# Altium PCB Midi_to_CV.PcbDoc
Units mil, origin at the board's own origin, x right, y up, seen from the top; angles counter-clockwise.
Board outline 2600 x 2200 mil, 2 copper layers (Top Layer, Bottom Layer); 25 components, 29 nets, 143 pads, 0 vias.
Unrouted connection lines stored in the file: 63.
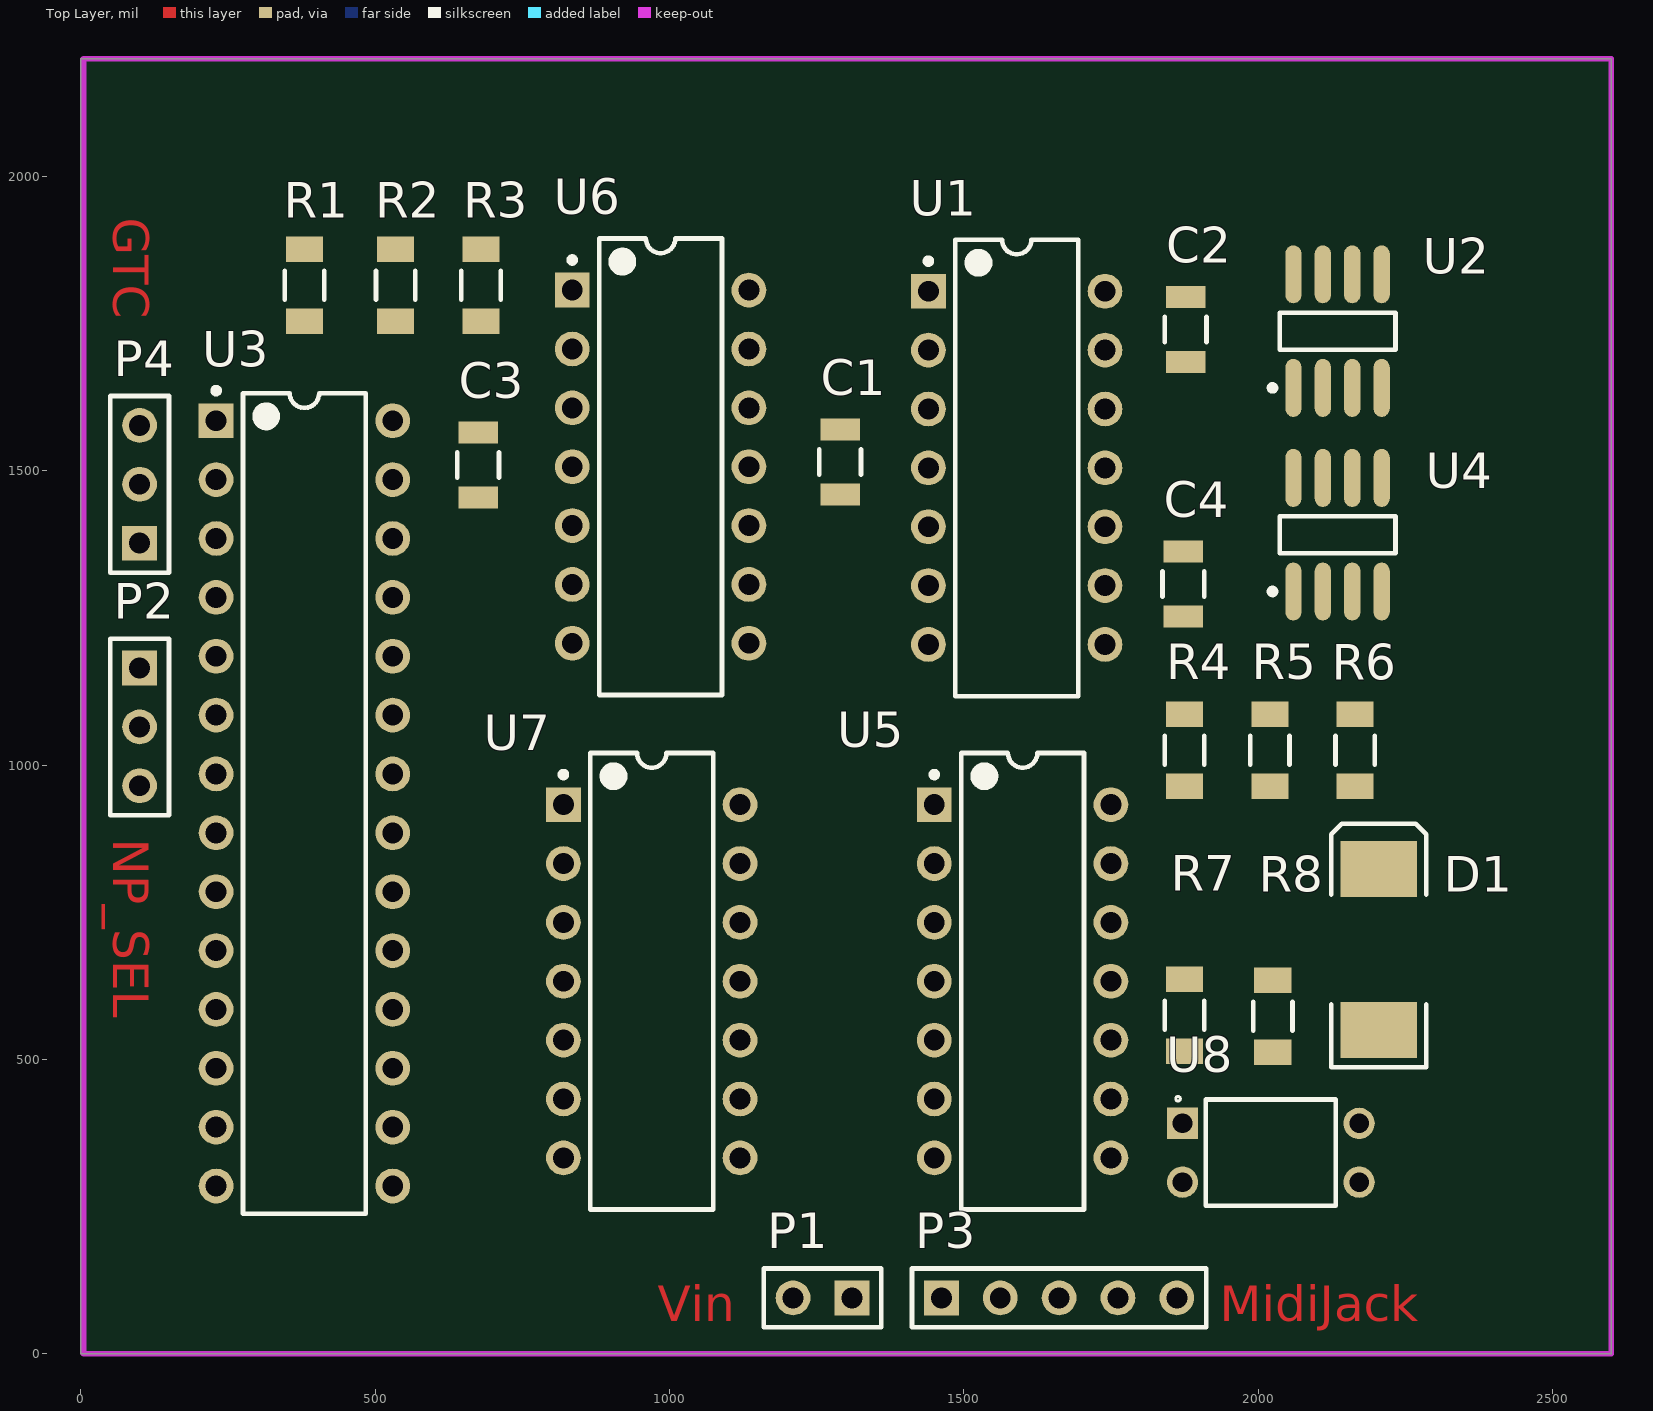
[diagram p0: Top Layer view]
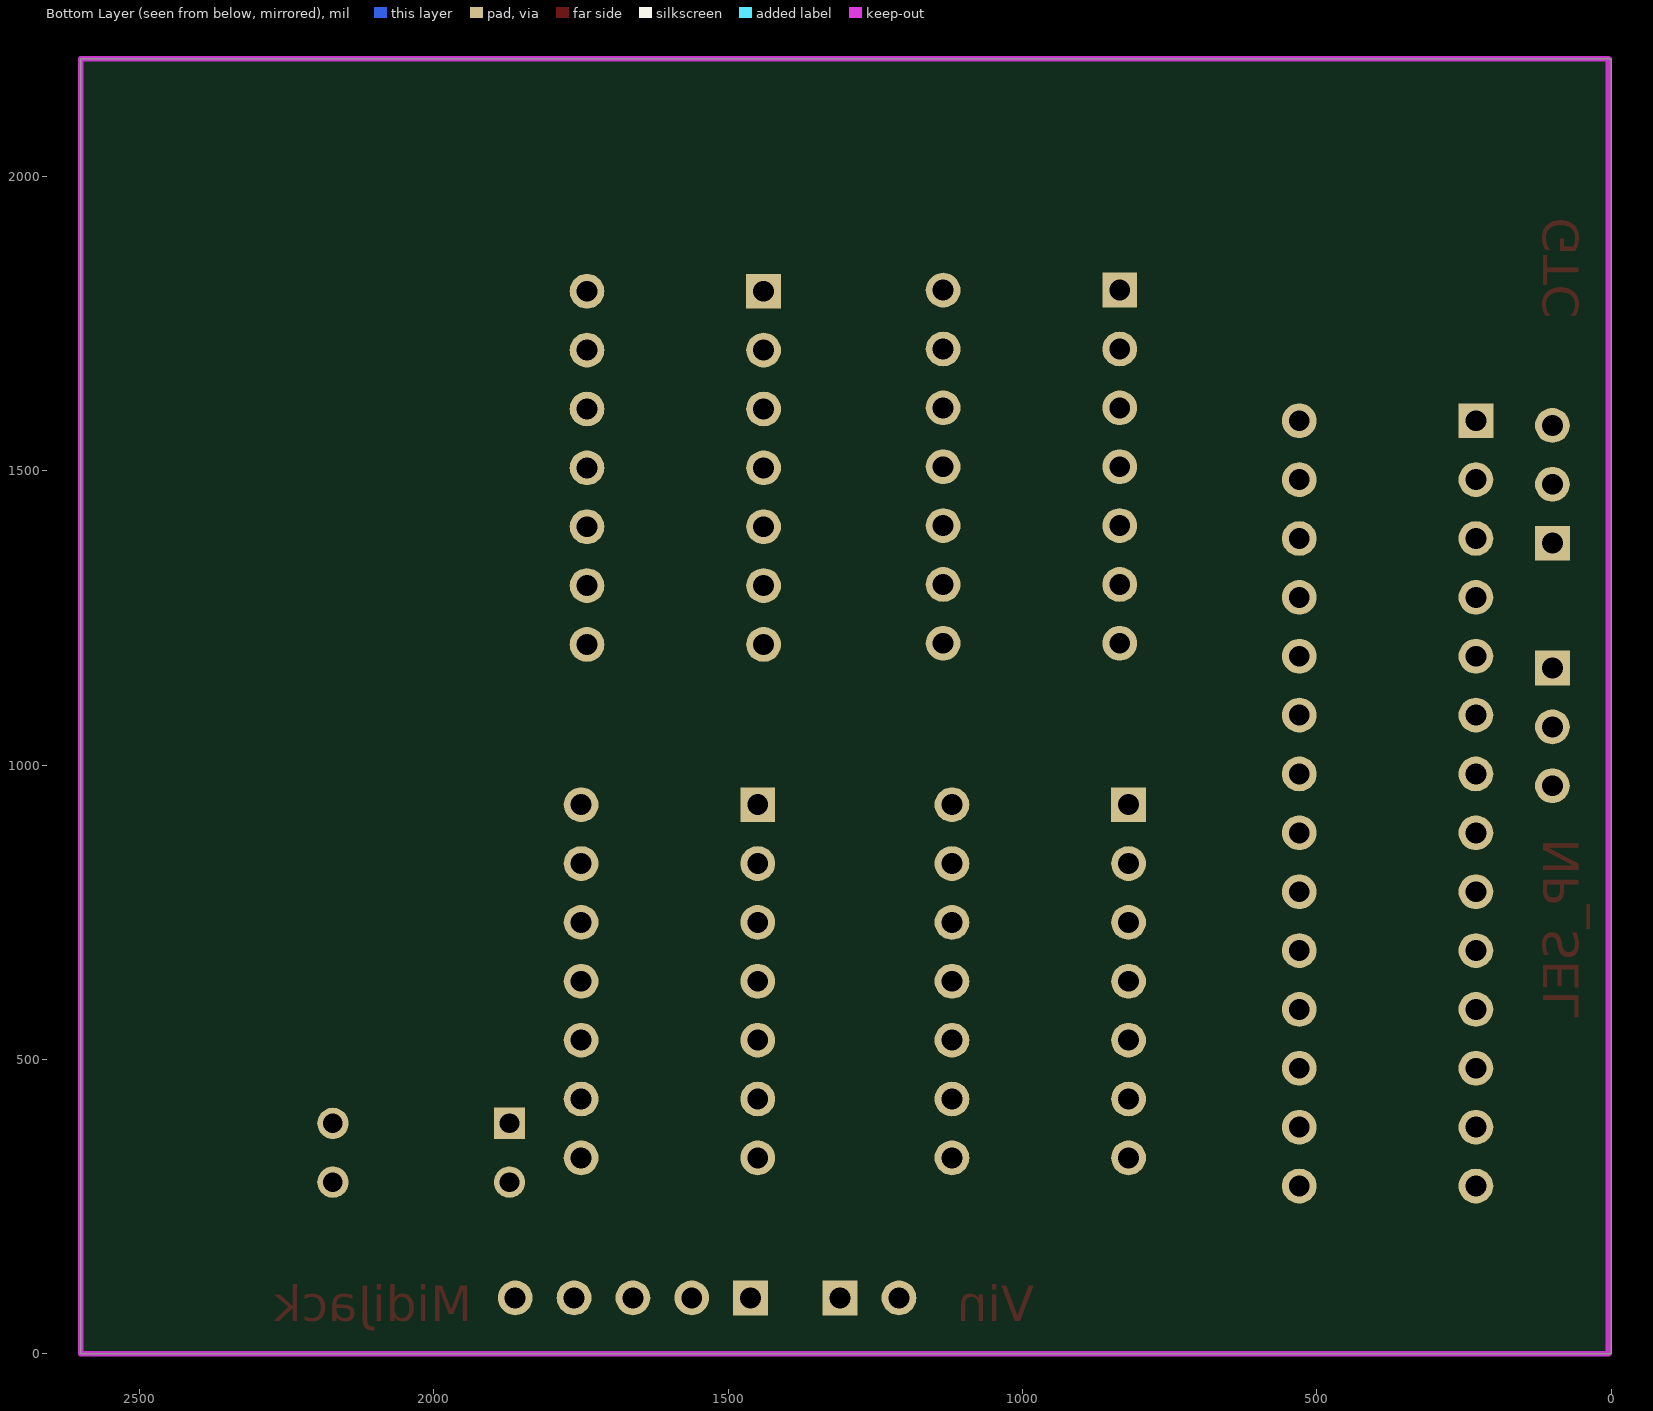
[diagram p1: Bottom Layer view, seen from below]

## Layer stack, top to bottom
Top Solder: solder mask 0.4, Solder Resist, Dk 3.5
Top Layer: signal copper 1.4
Dielectric 1: dielectric 12.6, FR-4, Dk 4.8
Bottom Layer: signal copper 1.4
Bottom Solder: solder mask 0.4, Solder Resist, Dk 3.5

## Board outline
0,0 0,2200 2600,2200 2600,0

## Design rules (kind name [scope] priority, off if disabled: settings)
Clearance [All] p1: gap=10 ignorepadtopadclearanceinfootprint=FALSE except(0: Arc-Hole Track-Hole SMDPad-Hole THPad-Hole Via-Hole Fill-Hole Poly-Hole Region-Hole Text-Hole)
PolygonConnect [All] p1: connectstyle=Relief reliefconductorwidth=10 reliefentries=4 polygonreliefangle="90 Angle" airgapwidth=10
RoutingVias [All] p1: holewidth=28 width=50 viastyle="Through Hole" minholewidth=28 minwidth=50 maxholewidth=28 maxwidth=50
SolderMaskExpansion [All] p1: expansion=4 istentingtop=FALSE
Width [All] p1: maxlimit=20 minlimit=10 preferedwidth=20 minimp=50.000000 maximp=50.000000 favimp=50.000000
30 further rules are at their usual default settings.

## Classes and differential pairs
component class Midi_to_CV: C1 C2 C3 C4 D1 P1 P2 P3 P4 R1 R2 R3 R4 R5 R6 R7 R8 U1 U3 U5 U6 U7 U8

## Components (designator, comment, footprint, x,y, rotation, side; value= is the part's Value field where it differs from the comment)
C1 "C1206C103JARACTU" FP-C1206C-EB-MFG 1290.12,1515 r270 top value="10,000 pF"
C2 "C1206C103JARACTU" FP-C1206C-EB-MFG 1876.97,1740.12 r90 top value="10,000 pF"
C3 "C1206C103JARACTU" FP-C1206C-EB-MFG 675,1510 r270 top value="10,000 pF"
C4 "C1206C103JARACTU" FP-C1206C-EB-MFG 1873.03,1307.8 r90 top value="10,000 pF"
D1 "Diode" SMC 2205,686.81 r90 top
P1 "J3" HDR1X2 1310,95 r180 top
P2 "NP_SEL" HDR1X3 100,1165 r270 top
P3 "MIDIJACK" HDR1X5 1462.01,95 r0 top
P4 "GTC_OUTL" HDR1X3 100,1377.09 r90 top
R1 "RNCP1206FTD4K02" FP-RNCP1206-MFG 380,1815 r90 top
R2 "RNCP1206FTD4K02" FP-RNCP1206-MFG 535,1815 r90 top
R3 "RNCP1206FTD4K02" FP-RNCP1206-MFG 680,1815 r90 top
R4 "RNCP1206FTD4K02" FP-RNCP1206-MFG 1875,1025 r270 top
R5 "RNCP1206FTD4K02" FP-RNCP1206-MFG 2020,1025 r90 top
R6 "RNCP1206FTD4K02" FP-RNCP1206-MFG 2165,1025 r90 top
R7 "RNCP1206FTD4K02" FP-RNCP1206-MFG 1875,575 r90 top
R8 "RNCP1206FTD4K02" FP-RNCP1206-MFG 2025,573.62 r90 top
U1 "LM324N" N0014A 1590,1505 r0 top
U2 "MCP4822-E/SN" SOIC-SN8_M 2135,1737.28 r90 top
U3 "ATmega328P-PU" 28P3 380,935 r0 top
U4 "MCP4822-E/SN" SOIC-SN8_M 2135,1391.46 r90 top
U5 "LM324N" N0014A 1600,632.83 r0 top
U6 "LM324N" N0014A 985,1506.93 r0 top
U7 "LM324N" N0014A 970,632.83 r0 top
U8 "SFH618A-2" DIP762W50P254L458H480Q4 2021.65,341.5 r0 top

## Footprints (in the part's own frame and the unit in brackets; to place one, negate y for a bottom-side part, rotate by r counter-clockwise, add the part's x,y. Pads: shape width x height; smd on the part's side, far side on the other; paste and mask are expansions set on the pad)
28P3 [mm] "28-Pin Plastic Dual In-Line Package (PDIP)"
  rect 1.5x1.5 hole 0.9: 1(-3.81,16.51)
  round 1.5 hole 0.9: 2(-3.81,13.97) 3(-3.81,11.43) 4(-3.81,8.89) 5(-3.81,6.35) 6(-3.81,3.81) 7(-3.81,1.27) 8(-3.81,-1.27) 9(-3.81,-3.81) 10(-3.81,-6.35) 11(-3.81,-8.89) 12(-3.81,-11.43) 13(-3.81,-13.97) 14(-3.81,-16.51) 15(3.81,-16.51) 16(3.81,-13.97) 17(3.81,-11.43) 18(3.81,-8.89) 19(3.81,-6.35) 20(3.81,-3.81) 21(3.81,-1.27) 22(3.81,1.27) 23(3.81,3.81) 24(3.81,6.35) 25(3.81,8.89) 26(3.81,11.43) 27(3.81,13.97) 28(3.81,16.51)
  silkscreen extent -3.93,-17.7 2.65,17.93, body extent -3.6,-17.65 3.6,17.65, height 4.58
DIP762W50P254L458H480Q4 [mm]
  rect 1.35x1.35 hole 0.85: 1(-3.81,1.27)
  round 1.35 hole 0.85: 2(-3.81,-1.27) 3(3.81,-1.27) 4(3.81,1.27)
  silkscreen extent -4.1,-2.29 2.8,2.43
FP-C1206C-EB-MFG [mm]
  rect 0.95x1.7 smd paste+0 mask+0: 1(-1.4,0) 2(1.4,0)
  silkscreen extent -0.55,-0.9 0.55,0.9, body extent -2,-1 2,1, height 0.25
FP-RNCP1206-MFG [mm]
  rect 1.1x1.6 smd paste+0 mask+0: 1(-1.55,0) 2(1.55,0)
  silkscreen extent -0.62,-0.85 0.62,0.85, body extent -2.2,-0.95 2.2,0.95, height 0.25
HDR1X2 [mm] "Connector; Header; 2 Position"
  rect 1.5x1.5 hole 0.9: 1(0,0)
  round 1.5 hole 0.9: 2(2.54,0)
  silkscreen extent -1.27,-1.27 3.81,1.27
HDR1X3 [mm] "Connector; Header; 3 Position"
  rect 1.5x1.5 hole 0.9: 1(0,0)
  round 1.5 hole 0.9: 2(2.54,0) 3(5.08,0)
  silkscreen extent -1.27,-1.27 6.35,1.27
HDR1X5 [mm] "Connector; Header; 5 Position"
  rect 1.5x1.5 hole 0.9: 1(0,0)
  round 1.5 hole 0.9: 2(2.54,0) 3(5.08,0) 4(7.62,0) 5(10.16,0)
  silkscreen extent -1.27,-1.27 11.43,1.27
N0014A [mm] "DIP, 14-Leads, Body 19.7x6.6mm, Pitch 2.54mm"
  rect 1.5x1.5 hole 0.9: 1(-3.81,7.62)
  round 1.5 hole 0.9: 2(-3.81,5.08) 3(-3.81,2.54) 4(-3.81,0) 5(-3.81,-2.54) 6(-3.81,-5.08) 7(-3.81,-7.62) 8(3.81,-7.62) 9(3.81,-5.08) 10(3.81,-2.54) 11(3.81,0) 12(3.81,2.54) 13(3.81,5.08) 14(3.81,7.62)
  silkscreen extent -3.93,-9.85 2.65,9.85, body extent -3.95,-9.85 3.95,9.85, height 5.08
SMC [mm] "DO-214-AB/SMC; 2 C-Bend Leads; Body 7.9 x 5.9 mm, inc. leads (LxW)"
  rect 2.4x3.3 smd: 1(-3.475,0) 2(3.475,0)
  silkscreen extent -5.07,-2.05 5.43,2.06
SOIC-SN8_M [mm] "SOIC, 8-Leads, Body 4.9x3.9mm, Pitch 1.27mm, IPC Low Density"
  oval 2.5x0.7 smd: 1(-2.45,1.905) 2(-2.45,0.635) 3(-2.45,-0.635) 4(-2.45,-1.905) 5(2.45,-1.905) 6(2.45,-0.635) 7(2.45,0.635) 8(2.45,1.905)
  silkscreen extent -2.57,-2.5 0.8,2.93, body extent -2,-2.5 2,2.5, height 1.75

## Part data
C1 C2 C3 C4: library part CMP-1037-03532-3, "CAP CER 10000PF 250V 5% X7R 1206", Capacitance="0.1 uF", Manufacturer=KEMET, Package=C1206C-EB, Temperature="-55°C to +150°C", Temperature Characteristic=X7R, Temperature Coefficient=15%, Temperature Range High=+150°C, Temperature Range Low=-55°C, Tolerance=0.05, Voltage Rating="250 V", Automotive=Yes, Automotive Grade="Grade 0", Category=Cap, ComponentLink2Description=Datasheet, ComponentLink2URL=https://content.kemet.com/datasheets/KEM_C1007_X8R_ULTRA_150C_SMD.pdf, Device Class L1="Passive Components", Device Class L2=Capacitors, Device Class L3="Ceramic Capacitors", Digikey Description="CAP CER 10000PF 250V 5% X7R 1206", Height=0.88mm, Ipc Land Pattern Name=CAPC320160X78, Lead Free=Yes, Manufacturer Part Number=C1206C103JARACTU, Material=Ceramic, Octopart=https://octopart.com/c1206c103jaractu-kemet-17306149, RoHS=TRUE
D1: "Default Diode", Code_JEDEC=DO-214-AB, LatestRevisionDate=17-Jul-2002, LatestRevisionNote="Re-released for DXP Platform.", PackageDescription="DO-214-AB/SMC; 2 C-Bend Leads; Body 7.9 x 5.9 mm, inc. leads (LxW)", PackageReference=SMC, PackageVersion=Sep-1996, Published=8-Jun-2000, Publisher="Altium Limited"
P1: library part "Header 2", "Header, 2-Pin", LatestRevisionDate=17-Jul-2002, LatestRevisionNote="Re-released for DXP Platform.", Publisher="Altium Limited"
P2 P4: library part "Header 3", "Header, 3-Pin", LatestRevisionDate=17-Jul-2002, LatestRevisionNote="Re-released for DXP Platform.", Publisher="Altium Limited"
P3: library part "Header 5", "Header, 5-Pin", LatestRevisionDate=17-Jul-2002, LatestRevisionNote="Re-released for DXP Platform.", Publisher="Altium Limited"
R1 R2 R3: library part CMP-26527-000272-1, "4.02kΩ ±1% 0.5W 1206 High Power Anti-Sulfur Thin Film Chip Resistor", Case Code (Imperial)=1206, Case Code (Metric)=3216, Max Operating Temperature=155°C, Max Power Dissipation=500mW, Min Operating Temperature=-55°C, Resistance=1K, Resistor Type="Thin Film", Temperature Coefficient=100ppm/°C, Tolerance=1%, Case/Package=1206, Features="Moisture Resistant", Height=0.024inch, Lead Free="Lead Free", Length=0.122inch, Mount="Surface Mount", Number of Terminations=2, Packaging="Cut Tape", RoHS Compliant=Yes, Series=RNCP, Width=0.059inch
R4: library part CMP-26527-000272-1, "4.02kΩ ±1% 0.5W 1206 High Power Anti-Sulfur Thin Film Chip Resistor", Case Code (Imperial)=1206, Case Code (Metric)=3216, Max Operating Temperature=155°C, Max Power Dissipation=500mW, Min Operating Temperature=-55°C, Resistance=10K, Resistor Type="Thin Film", Temperature Coefficient=100ppm/°C, Tolerance=1%, Case/Package=1206, Features="Moisture Resistant", Height=0.024inch, Lead Free="Lead Free", Length=0.122inch, Mount="Surface Mount", Number of Terminations=2, Packaging="Cut Tape", RoHS Compliant=Yes, Series=RNCP, Width=0.059inch
R5: library part CMP-26527-000272-1, "4.02kΩ ±1% 0.5W 1206 High Power Anti-Sulfur Thin Film Chip Resistor", Case Code (Imperial)=1206, Case Code (Metric)=3216, Max Operating Temperature=155°C, Max Power Dissipation=500mW, Min Operating Temperature=-55°C, Resistance=3K, Resistor Type="Thin Film", Temperature Coefficient=100ppm/°C, Tolerance=1%, Case/Package=1206, Features="Moisture Resistant", Height=0.024inch, Lead Free="Lead Free", Length=0.122inch, Mount="Surface Mount", Number of Terminations=2, Packaging="Cut Tape", RoHS Compliant=Yes, Series=RNCP, Width=0.059inch
R6: library part CMP-26527-000272-1, "4.02kΩ ±1% 0.5W 1206 High Power Anti-Sulfur Thin Film Chip Resistor", Case Code (Imperial)=1206, Case Code (Metric)=3216, Max Operating Temperature=155°C, Max Power Dissipation=500mW, Min Operating Temperature=-55°C, Resistance=4.7k, Resistor Type="Thin Film", Temperature Coefficient=100ppm/°C, Tolerance=1%, Case/Package=1206, Features="Moisture Resistant", Height=0.024inch, Lead Free="Lead Free", Length=0.122inch, Mount="Surface Mount", Number of Terminations=2, Packaging="Cut Tape", RoHS Compliant=Yes, Series=RNCP, Width=0.059inch
R7: library part CMP-26527-000272-1, "4.02kΩ ±1% 0.5W 1206 High Power Anti-Sulfur Thin Film Chip Resistor", Case Code (Imperial)=1206, Case Code (Metric)=3216, Max Operating Temperature=155°C, Max Power Dissipation=500mW, Min Operating Temperature=-55°C, Resistance=220, Resistor Type="Thin Film", Temperature Coefficient=100ppm/°C, Tolerance=1%, Case/Package=1206, Features="Moisture Resistant", Height=0.024inch, Lead Free="Lead Free", Length=0.122inch, Mount="Surface Mount", Number of Terminations=2, Packaging="Cut Tape", RoHS Compliant=Yes, Series=RNCP, Width=0.059inch
R8: library part CMP-26527-000272-1, "4.02kΩ ±1% 0.5W 1206 High Power Anti-Sulfur Thin Film Chip Resistor", Case Code (Imperial)=1206, Case Code (Metric)=3216, Max Operating Temperature=155°C, Max Power Dissipation=500mW, Min Operating Temperature=-55°C, Resistance=500, Resistor Type="Thin Film", Temperature Coefficient=100ppm/°C, Tolerance=1%, Case/Package=1206, Features="Moisture Resistant", Height=0.024inch, Lead Free="Lead Free", Length=0.122inch, Mount="Surface Mount", Number of Terminations=2, Packaging="Cut Tape", RoHS Compliant=Yes, Series=RNCP, Width=0.059inch
U1 U5 U6 U7: library part CMP-0055-00082-3, "Low Power Quad Operational Amplifier, 14-pin MDIP", Manufacturer="Texas Instruments", Package Reference=N0014A, PackageTopMarking=NSUZXYYTTE#*LM324N, PowerWise=N, Code_JEDEC=MS-001-AA, ComponentLink1Description="Datasheet URL", ComponentLink1URL=http://www.ti.com/general/docs/lit/getliterature.tsp?genericPartNumber=LM324&fileType=pdf, CompType=Amplifiers, PackageDescription="MDIP, .750 x .250 x.130in, 14 Lead, .100in Pitch", PinCount=14, RoHS=N
U2 U4: library part CMP-0188-00505-2, "12-Bit DACs with Internal VREF and SPI Interface, 8-Pin SOIC 150mil, Extended Temperature", Code_IPC=SOIC127P600-8, Code_JEDEC=MS-012, ComponentLink1Description="Manufacturer URL", ComponentLink1URL=http://www.microchip.com/, ComponentLink2Description=Datasheet, ComponentLink2URL=http://ww1.microchip.com/downloads/en/DeviceDoc/22249A.pdf, ComponentLink3Description="Package Specification", ComponentLink3URL=http://www.microchip.com/stellent/groups/techpub_sg/documents/packagingspec/en012702.pdf, DatasheetVersion="revA, Apr-2010", PackageDescription="8-Lead Plastic Small Outline (SN) - Narrow, 3.90mm Body [SOIC]", PackageReference=SOIC-SN8, PackageVersion="revBB, Aug-2009", RevisionNote="URLs added. DatasheetVersion updated. Sch updated."
U3: library part CMP-0095-00013-2, "8-bit AVR Microcontroller, 32KB Flash, 1KB EEPROM, 2KB SRAM, 28-pin PDIP, Industrial Grade (-40°C to 85°C)", ComponentLink1Description="Manufacturer URL", ComponentLink1URL=http://www.atmel.com/, ComponentLink2Description="ATmega48A/48PA/88A/88PA/168A/168PA/328/328P Datasheet", ComponentLink2URL=http://www.atmel.com/dyn/resources/prod_documents/8271.pdf, ComponentLink3Description="ATmega48A/48PA/88A/88PA/168A/168PA/328/328P Summary", ComponentLink3URL=http://www.atmel.com/dyn/resources/prod_documents/8271S.pdf, DatasheetVersion="revD, May-2011", PackageDescription="28-lead (0.300\"/7.62mm Wide) Plastic Dual Inline Package (PDIP)", PackageReference=28P3, PackageVersion="revB, Sep-2001", RevisionNote="DatasheetVersion updated. URLs added."
U8: Package=None, Availability=Unavailable, MP=SFH618A-2, Price=None

## Nets (pads, with @x,y where several pads share a name; then routed paths per layer and width w, separated by ;. In a path a pad name is that pad's centre, name@x,y a point inside that pad or via, vN(x,y) a via of type N, cw(c..) or ccw(c..) an arc to the next point about the centre after c; other vN are vias at no path point)
5V: C2.2 C3.2 C4.2 R8.2 U2.1 U3.7 U3.20 U4.1
A0: P2.3 U3.23
A1: C1.1 C2.1 C3.1 C4.1 P1.2 P2.2 P3.2 R4.1 U1.4 U2.5 U2.7 U3.8 U3.22 U3.24 U4.5 U4.7 U5.4 U6.4 U7.4 U8.3
A2: P2.1 U3.25
CLOCK: P4.1 R3.1
CONTROL: U5.1 U5.2
D2: R1.2 U3.4
D3: R2.2 U3.5
D4: R3.2 U3.6
D8: U3.14 U4.2
D9: U2.2 U3.15
D11: U2.4 U3.11 U4.4
D13: U2.3 U3.19 U4.3
GATE: P4.3 R1.1
NetD1_1: D1.1 P3.5 U8.2
NetD1_2: D1.2 R7.2 U8.1
NetP3_4: P3.4 R7.1
NetR4_2: R4.2 R5.1 U6.2
NetR5_2: R5.2 R6.1
NetU1_3: U1.3 U2.8
NetU2_6: U2.6 U5.3
NetU4_6: U4.6 U7.3
NetU4_8: U4.8 U6.3
NOTE: R6.2 U6.1
OP_AMP_V+: C1.2 P1.1 U1.11 U5.11 U6.11 U7.11
PITCH_BEND: U1.1 U1.2
RX0: R8.1 U3.2 U8.4
TRIGGER: P4.2 R2.1
VELOCITY: U7.1 U7.2
pads on no net: P3.1 P3.3 U1.5 U1.6 U1.7 U1.8 U1.9 U1.10 U1.12 U1.13 U1.14 U3.1 U3.3 U3.9 U3.10 U3.12 U3.13 U3.16 U3.17 U3.18 U3.21 U3.26 U3.27 U3.28 U5.5 U5.6 U5.7 U5.8 U5.9 U5.10 U5.12 U5.13 U5.14 U6.5 U6.6 U6.7 U6.8 U6.9 U6.10 U6.12 U6.13 U6.14 U7.5 U7.6 U7.7 U7.8 U7.9 U7.10 U7.12 U7.13 U7.14

## Keep-outs
Keep-Out Layer:
  lines w10: 5,0 2600,0 2600,2200 5,2200 5,0

## Other copper
Top Layer:
  text "GTC" at 55,1930 h60 r270
  text "NP_SEL" at 55,875 h60 r270
  text "Vin" at 980,55 h60
  text "MidiJack" at 1935,55 h60